# Altium PCB Recovery.PcbDoc (part 1 of 3)
Units mil, origin at the board's own origin, x right, y up, seen from the top; angles counter-clockwise.
Board outline 11025 x 3525 mil, 2 copper layers (Top Layer, Bottom Layer), stack 65.792 mil thick; 249 components, 149 nets, 729 pads, 156 vias.
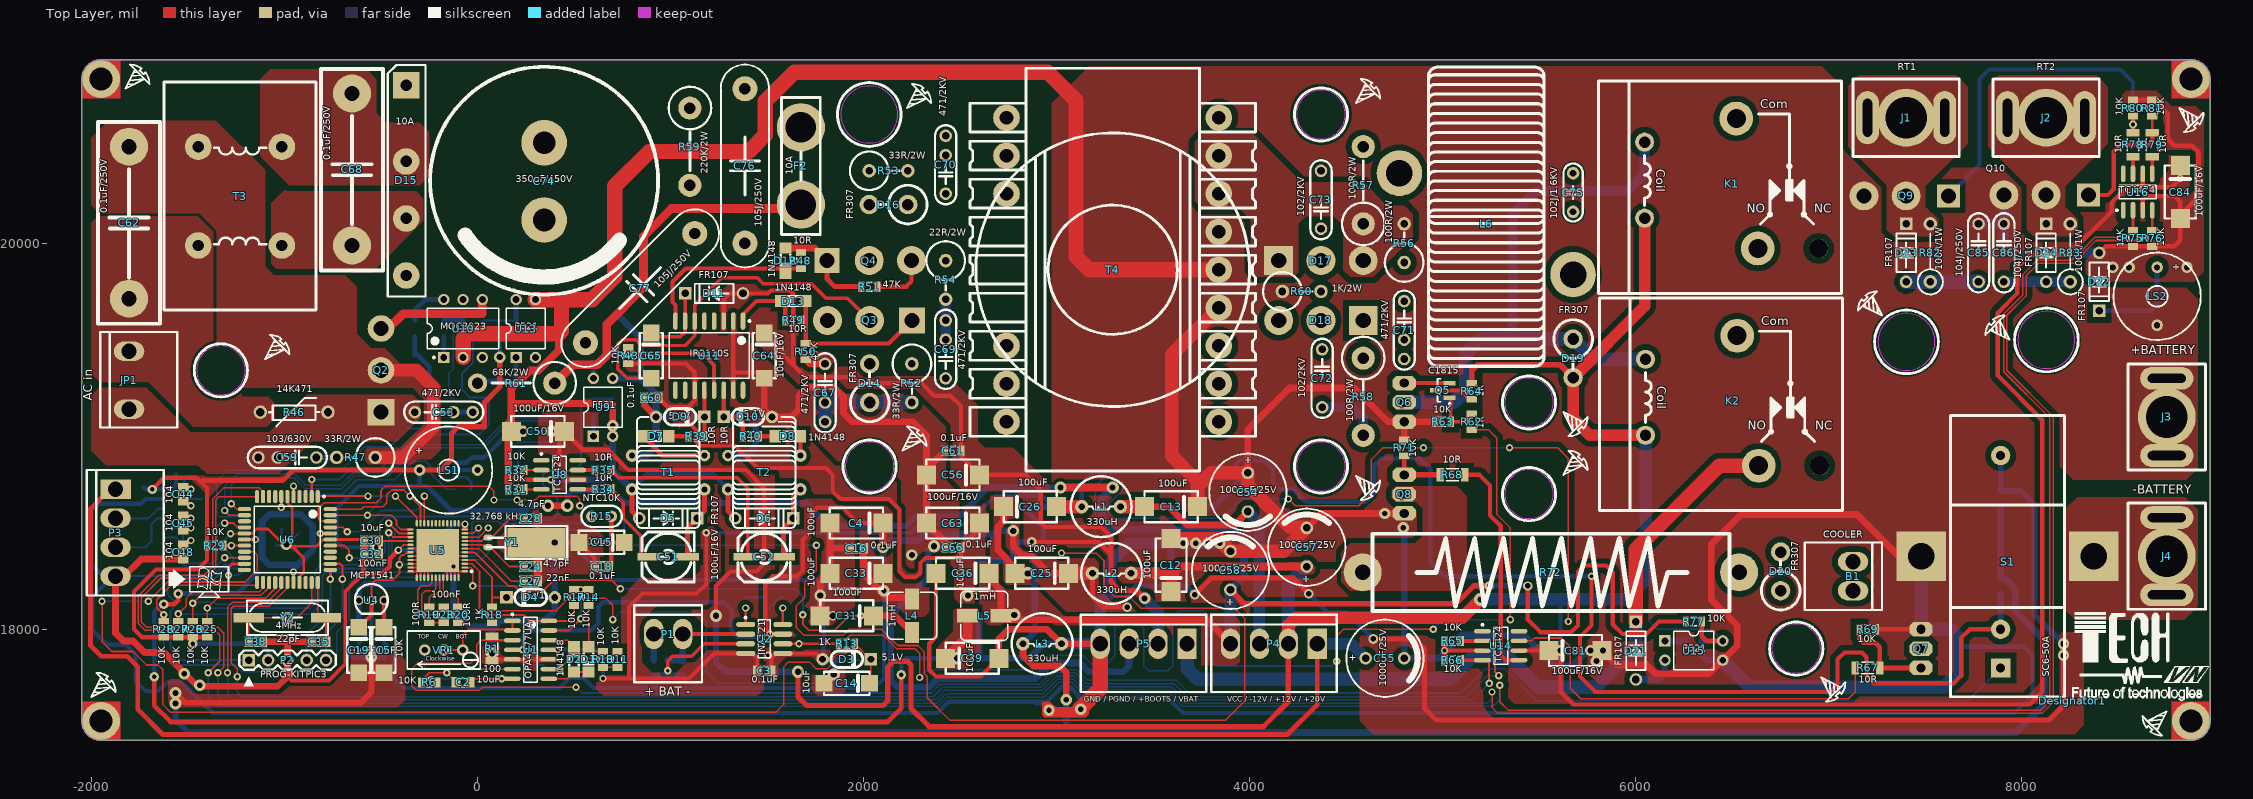
[diagram p0: Top Layer view]
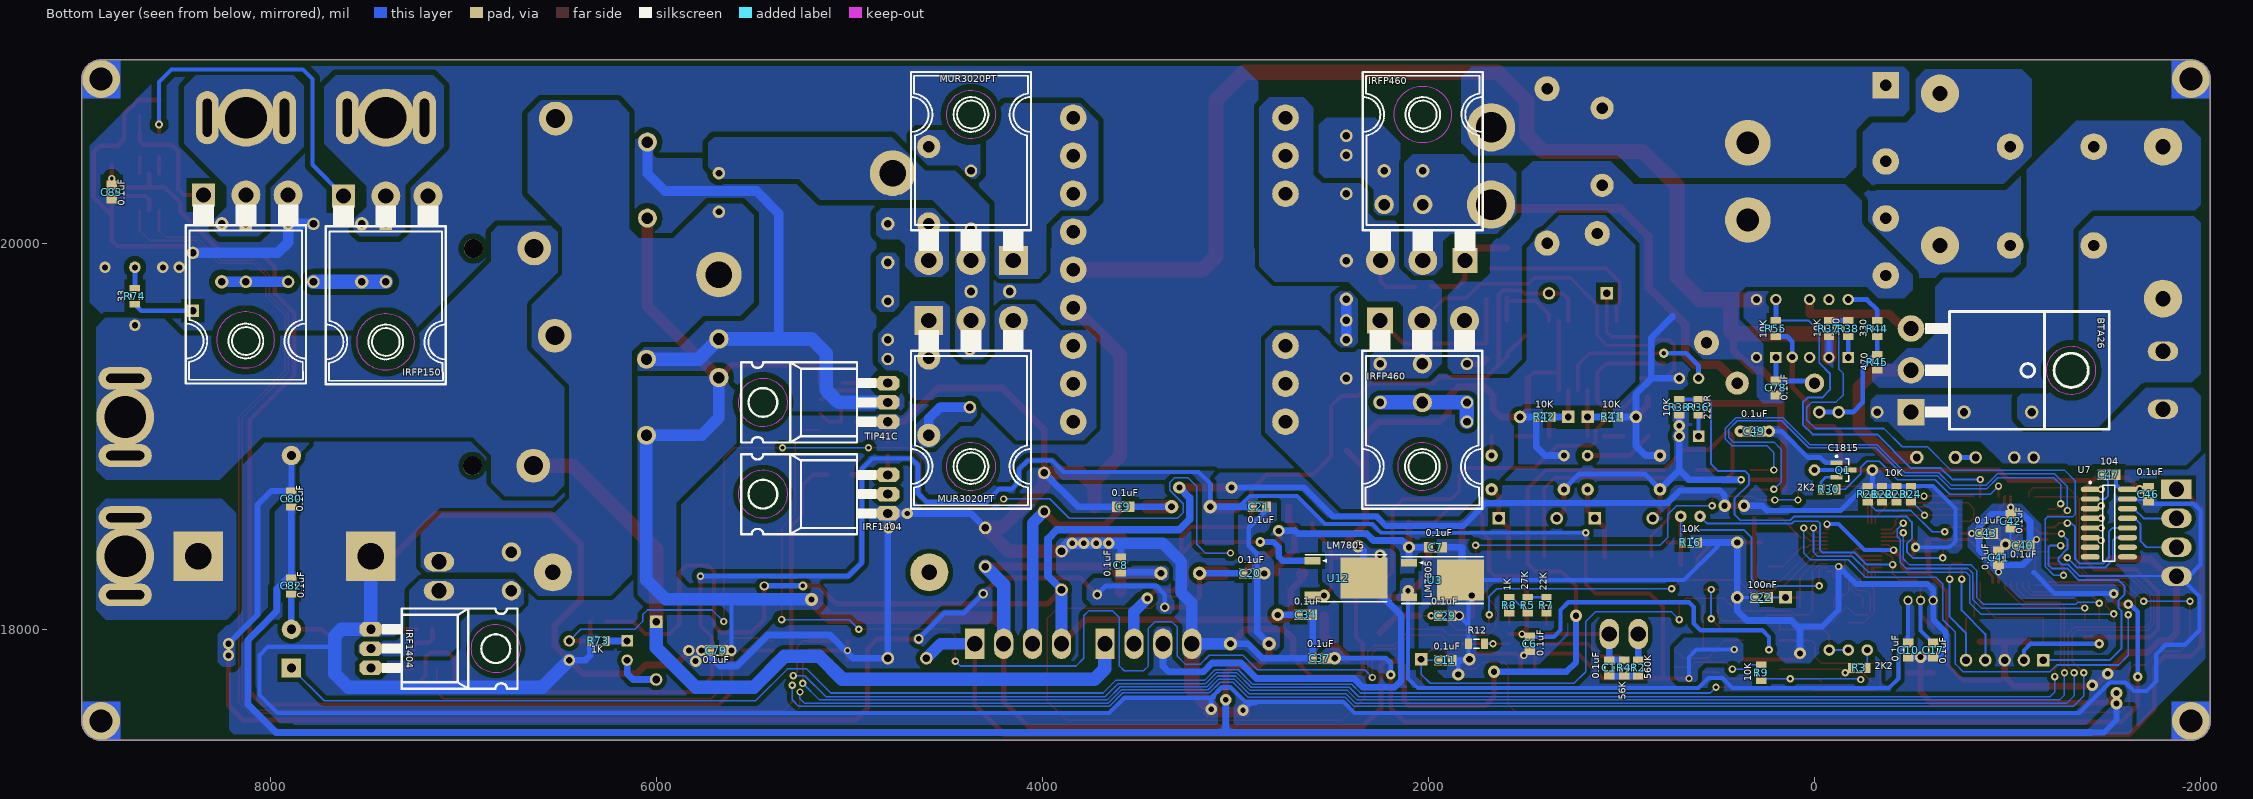
[diagram p1: Bottom Layer view, seen from below]

## Layer stack, top to bottom
Top Layer: signal copper 1.4
Dielectric: core 62.9921, FR-4, Dk 4.8
Bottom Layer: signal copper 1.4

## Board outline
-1950,17425 cw(c-1950,17525) -2050,17525 -2050,20850 cw(c-1950,20850) -1950,20950 8875,20950 cw(c8875,20850) 8975,20850 8975,17525 cw(c8875,17525) 8875,17425

## Design rules (kind name [scope] priority, off if disabled: settings)
Clearance [All] p1: gap=4
FabricationTestPointUsage TestPointUsage [All] p1: valid=0 allowmultiple=FALSE
FabricationTestpoint Testpoint [All] p1: side=3 testpointundercomponent=TRUE minsize=40 maxsize=100 preferedsize=60 minholesize=0 maxholesize=40 preferedholesize=32 testpointgrid=1 allowsidetop=TRUE allowsidebottom=TRUE usegrid=TRUE gridtolerance=0.01
HoleSize [All] p1: absolutevalues=TRUE maxlimit=99999 minlimit=1 maxpercent=80.000 minpercent=20.000
HoleToHoleClearance [All] p1: gap=0 allowstackedmicrovias=TRUE
MinimumSolderMaskSliver [All] p1: minsoldermaskwidth=0
PlaneConnect [All] p1: planeconnectstyle=Direct reliefexpansion=20 reliefentries=4 reliefconductorwidth=10 reliefairgap=10
PolygonConnect [All] p1: connectstyle=Direct reliefconductorwidth=10 reliefentries=4 polygonreliefangle="90 Angle"
RoutingVias [All] p1: holewidth=28 width=50 viastyle="Through Hole" minholewidth=28 minwidth=20 maxholewidth=200 maxwidth=500
SilkToSilkClearance [All] p1: silktosilkclearance=0
SilkscreenOverComponentPads [All] p1: minsilkscreentomaskgap=0
SolderMaskExpansion [All] p1: expansion=4
Width [All] p1: maxlimit=99999 minlimit=8 preferedwidth=99999
20 further rules are at their usual default settings.

## Classes and differential pairs
component class CPU: C1 C2 C3 C4 C5 C6 C7 C8 C9 C10 C11 C12 C13 C14 C15 C16 C17 C18 C19 C20 C21 C22 C23 C24 C25 C26 C27 C28 C29 C30 C31 C32 C33 C34 C35 C36 C37 C38 C39 C40 C41 C42 C43 C44 C45 C46 C47 C48 D1 D2 D3 D4 L1 L2 L3 L4 L5 LS1 P1 P2 P3 Q1 R1 R2 R3 R4 R5 R6 R7 R8 R9 R10 R11 R12 R13 R14 R15 R16 R17 R18 R19 R20 R21 R22 R23 R24 R25 R26 R27 R28 R29 R30 U1 U2 U3 U4 U5 U6 U7 VR1 Y1 Y2
component class Power: B1 BT1 C49 C50 C51 C52 C53 C54 C55 C56 C57 C58 C59 C60 C61 C62 C63 C64 C65 C66 C67 C68 C69 C70 C71 C72 C73 C74 C75 C76 C77 C78 C79 C80 C81 C82 C83 C84 C85 C86 D5 D6 D7 D8 D9 D10 D11 D12 D13 D14 D15 D16 D17 D18 D19 D20 D21 D22 D23 D24 F2 J1 J2 J3 J4 J5 JP1 K1 K2 L6 LS2 P4 P5 Q2 Q3 Q4 Q5 Q6 Q7 Q8 Q9 Q10 R31 R32 R33 R34 R35 R36 R37 R38 R39 R40 R41 R42 R43 R44 R45 R46 R47 R48 R49 R50 R51 R52 R53 R54 R55 R56 R57 R58 R59 R60 R61 R62 R63 R64 R65 R66 R67 R68 R69 R70 R71 R72 R73 R74 R75 R76 R77 R78 R79 R80 R81 R82 R83 RT1 RT2 S1 T1 T2 T3 T4 U8 U9 U10 U11 U12 U13 U14 U15 U16

## Components (designator, comment, footprint, x,y, rotation, side; value= is the part's Value field where it differs from the comment)
B1 "COOLER" H2-15A 7125,18350 r270 top
C1 "0.1uF" C0805 1062.5,17800 r270 bottom
C2 "10uF" C0805 -75,17725 r180 top
C3 "0.1uF" C0805 1485,17785 r0 top
C4 "100uF" C107-SMD 2100,18550 r0 top
C5 "10uF" C106-SMD -485,17775 r90 top
C6 "0.1uF" C0805 1475,17925 r270 bottom
C7 "0.1uF" C0805 1962.5,18425 r180 bottom
C8 "0.1uF" C0805 3592.5,18332.5 r90 bottom
C9 "0.1uF" C0805 3580,18635 r180 bottom
C10 "0.1uF" C0805 -485,17892.5 r270 bottom
C11 "0.1uF" C0805 1912.5,17840 r180 bottom
C12 "100uF" C107-SMD 3592.5,18195 r270 top
C13 "100uF" C107-SMD 3730,18635 r0 top
C14 "10uF" C106-SMD 1795,17720 r0 top
C15 "10uF" C106-SMD 525,18450 r0 top
C16 "0.1uF" C0805 1962.5,18420 r180 top
C17 "0.1uF" C0805 -615,17892.5 r270 bottom
C18 "0.1uF" C0805 642.5,18325 r180 top
C19 "10uF" C106-SMD -615,17775 r90 top
C20 "0.1uF" C0805 2922.5,18290 r180 bottom
C21 "0.1uF" C0805 2875,18635 r0 bottom
C22 "100nF" C0805 275,18165 r0 bottom
C23 "100nF" C0805 -175,18075 r90 top
C24 "4.7pF" C0805 275,18325 r0 top
C25 "100uF" C107-SMD 3060,18290 r0 top
C26 "100uF" C107-SMD 2725,18635 r180 top
C27 "22nF" C0805 275,18250 r180 top
C28 "4.7pF" C0805 275,18575 r0 top
C29 "0.1uF" C0805 1912.5,18070 r180 bottom
C30 "10uF" C0805 -550,18457.48 r0 top
C31 "100uF" C107-SMD 2050,18070 r0 top
C32 "100nF" C0805 -550,18390 r180 top
C33 "100uF" C107-SMD 2100,18290 r0 top
C34 "0.1uF" C0805 2635.33,18075 r180 bottom
C35 "22pF" C0805 -821.42,17935 r0 top
C36 "100uF" C107-SMD 2650,18290 r0 top
C37 "0.1uF" C0805 2562.5,17850 r0 bottom
C38 "22pF" C0805 -1148.58,17935 r180 top
C39 "100uF" C107-SMD 2425,17850 r180 top
C40 "0.1uF" C0805 -1079.49,18433.5 r0 bottom
C41 "0.1uF" C0805 -953.5,18370.51 r90 bottom
C42 "0.1uF" C0805 -1016.5,18559.49 r270 bottom
C43 "0.1uF" C0805 -890.51,18496.5 r180 bottom
C44 "104" C0805 -1525,18700 r270 top
C45 "104" C0805 -1525,18550 r270 top
C46 "0.1uF" C0805 -1730,18700 r270 bottom
C47 "104" C0805 -1525,18800 r0 bottom
C48 "104" C0805 -1525,18400 r90 top
C49 "0.1uF" C0805 312.5,19025 r180 bottom
C50 "100uF/16V" C107-SMD 450,19025 r0 top
C51 "100uF/16V" CAP-100UF/16V 887.5,18375 r0 top
C52 "100uF/16V" CAP-100UF/16V 1385,18375 r0 top
C53 "471/2KV" CAP2/3#1 -325,19125 r0 top
C54 "1000uF/25V" C-400 3990,18710 r90 top
C55 "1000uF/25V" C-400 4700,17850 r180 top
C56 "100uF/16V" C107-SMD 2600,18800 r0 top
C57 "1000uF/25V" C-400 4295,18425 r270 top
C58 "1000uF/25V" C-400 3900,18305 r270 top
C59 "103/630V" CAP2/3#1 -835,18890 r180 top
C60 "0.1uF" C0805 900,19200 r180 top
C61 "0.1uF" R0805 2462.5,18925 r180 top
C62 "0.1uF/250V" CAP-105J/250V -1805,20500 r270 top
C63 "100uF/16V" C107-SMD 2600,18550 r0 top
C64 "10uF/16V" C106-SMD 1485,19300 r90 top
C65 "1uF" C106-SMD 900,19300 r90 top
C66 "0.1uF" R0805 2462.5,18425 r180 top
C67 "471/2KV" CAP2/3#1 1800,19375 r270 top
C68 "0.1uF/250V" CAP-105J/250V -650,20775.59 r270 top
C69 "471/2KV" CAP2/3#1 2425,19300 r90 top
C70 "471/2KV" CAP2/3#1 2425,20256.3 r90 top
C71 "471/2KV" CAP2/3#1 4800,19700 r270 top
C72 "102/2KV" CAP2/3#2 4375,19450 r270 top
C73 "102/2KV" CAP2/3#2 4368.9,20075 r90 top
C74 "350uF/450V" CAP-330uH-450V 345,20320.28 r270 top
C75 "102J/1.6KV" CAP200 5675,20162.5 r180 top
C76 "105J/250V" CAP800 1385,20800 r270 top
C77 "105J/250V" CAP800 1125,20050 r225 top
C78 "0.1uF" C0805 200,19250 r270 bottom
C79 "0.1uF" C0805 5687.5,17890 r0 bottom
C80 "0.1uF" R0805 7889.57,18675 r90 bottom
C81 "100uF/16V" C107-SMD 5550,17890 r180 top
C82 "0.1uF" R0805 7889.57,18225 r90 bottom
C83 "0.1uF" C0805 8820,20265 r270 bottom
C84 "100uF/16V" C107-SMD 8820,20402.5 r90 top
C85 "104J/250V" CAP2/3#2 7775,20100 r270 top
C86 "104J/250V" CAP2/3#2 7906.1,20100 r270 top
D1 "1N4148" 1N4148-SMD 575,17908.9 r270 top
D2 "1N4148" 1N4148-SMD 500,17778.9 r90 top
D3 "5.1V" 1N4148 1787.5,17845 r0 top
D4 "5V1" 1N4148 400,18165 r180 top
D5 "FR107" DIODE-1A/300 837.5,18575 r0 top
D6 "FR107" DIODE-1A/300 1335,18575 r0 top
D7 "1N4148" 1N4148-SMD 860,19000 r0 top
D8 "1N4148" 1N4148-SMD 1672.5,19000 r180 top
D9 "5.1V" 1N4148 925,19100 r0 top
D10 "5.1V" 1N4148 1525,19100 r180 top
D11 "FR107" DIODE-1A/300 1375,19740 r180 top
D12 "1N4148" 1N4148-SMD 1595,19975 r270 top
D13 "1N4148" 1N4148-SMD 1700,19700 r180 top
D14 "FR307" FR307 2031.1,19175 r90 top
D15 "10A" DB-10A -370,20325 r270 top
D16 "FR307" FR307 2228.9,20200 r180 top
D17 "MUR3020PT" TO-247-OUTLINE#1 4150,19910 r0 top
D18 "MUR3020PT" TO-247-OUTLINE#1 4587.8,19600 r180 top
D19 "FR307" FR307 5675,19503.7 r270 top
D20 "FR307" FR307 6750,18200 r90 top
D21 "FR107" DIODE-1A/300 6000,17740 r90 top
D22 "FR107" DIODE-1A/300 8400,19950 r270 top
D23 "FR107" DIODE-1A/300 7400,19800 r90 top
D24 "FR107" DIODE-1A/300 8125,19800 r90 top
Designator1 "Comment" ? 8260,17630 r0 top
F2 "10A" FUSE-DC 1675,20200 r90 top
J1 "RT1" M4-ON 7400,20650 r180 top
J2 "RT2" M4-ON 8125,20650 r180 top
J3 "+BATTERY" M4-ON 8750,19100 r270 top
J4 "-BATTERY" M4-ON 8750,18378.74 r270 top
JP1 "AC in" H3-15A -1805,19440 r180 top
K1 "RELAY30A" RELAY30A 6045,20130 r0 top
K2 "RELAY30A" RELAY30A 6050,19005 r0 top
L1 "330uH" L-330uH 3330,18635 r180 top
L2 "330uH" L-330uH 3385,18290 r180 top
L3 "330uH" L-330uH 3025,17925 r180 top
L4 "1mH" IND-7447785002 2250,18070 r270 top
L5 "1mH" IND-7447785002 2625,18070 r180 top
L6 "Inductor Iron" IND-10A 5225,20100 r270 top
LS1 "Speaker" BEEPER 0,18825 r180 top
LS2 "Speaker" BEEPER 8700,19575 r90 top
P1 "Header 2" H2-15A 912.5,17975 r0 top
P2 "PROG-KITPIC3" CON-5B -1185,17840 r90 top
P3 "Header 4" H4-15A -1875,18725 r180 top
P4 "Header 4" H4-15A 4350,17925 r90 top
P5 "Header 4" H4-15A 3675,17925 r90 top
Q1 "C1815" SOT-23 -150,18825 r180 bottom
Q2 "BTA26" TOP3 -500,19125 r90 top
Q3 "IRFP460" TO-247-OUTLINE#2 2250,19600 r180 top
Q4 "IRFP460" TO-247-OUTLINE#3 1810,19910 r0 top
Q5 "C1815" SOT-23 5000,19237.6 r180 top
Q6 "TIP41C" "TO-220-FULL OUTLINE" 4800,19275 r270 top
Q7 "IRF1404" "TO-220-FULL OUTLINE" 7477.56,17800 r90 top
Q8 "IRF1404" "TO-220-FULL OUTLINE" 4800,18800 r270 top
Q9 "IRFP150" TO-247-OUTLINE#4 7618.9,20245 r180 top locked
Q10 "IRFP150" TO-247-OUTLINE#4 8343.9,20250 r180 top
R1 "100" R1206 75,17900 r90 top
R2 "560K" R0805 912.5,17800 r270 bottom
R3 "2K2" R0805 -232.09,17800 r180 bottom
R4 "56K" R0805 985,17800 r270 bottom
R5 "27K" R0805 1485,18125 r270 bottom
R6 "10K" R0805 -250,17725 r180 top
R7 "22K" R0805 1388.54,18125 r90 bottom
R8 "1K" R0805 1581.46,18125 r270 bottom
R9 "10K" R0805 275,17775 r270 bottom
R10 "10K" R0805 650,17843.9 r270 top
R11 "10K" R0805 725,17843.9 r270 top
R12 "10K" R0805 1750,17925 r0 bottom
R13 "1K" R0805 1912.5,17925 r0 top
R14 "10K" R0805 575,18165 r270 top
R15 "NTC10K" CAP100 592.5,18585 r0 top
R16 "10K" R0805 642.5,18450 r180 bottom
R17 "10K" R0805 500,18165 r90 top
R18 "1K" R0805 75,18075 r270 top
R19 "100R" R0805 -250,18075 r90 top
R20 "100R" R0805 -100,18075 r90 top
R21 "10K" R0805 -275.47,18700 r90 bottom
R22 "10K" R0805 -350,18700 r90 bottom
R23 "10K" R0805 -425,18700 r90 bottom
R24 "10K" R0805 -500,18700 r90 bottom
R25 "10K" R0805 -1400,18000 r270 top
R26 "10K" R0805 -1475,18000 r270 top
R27 "10K" R0805 -1550,18000 r270 top
R28 "10K" R0805 -1625,18000 r270 top
R29 "10K" R0805 -1360,18433.5 r0 top
R30 "2K2" R0805 -75,18725 r180 bottom
R31 "10K" R0805 200,18725 r180 top
R32 "10K" R0805 200,18825 r180 top
R33 "10K" R0805 700,19150 r270 bottom
R34 "10R" R0805 650,18725 r180 top
R35 "10R" R0805 650,18825 r180 top
R36 "220R" R0805 600,19150 r90 bottom
R37 "10K" R0805 -75,19558.07 r270 bottom
R38 "330" R0805 -175,19558.07 r90 bottom
R39 "10R" R0805 1133.66,19000 r180 top
R40 "10R" R0805 1415,19000 r0 top
R41 "10K" R0805 1050,19100 r180 bottom
R42 "10K" R0805 1400,19100 r0 bottom
R43 "10K" R0805 780,19417.5 r90 top
R44 "330" R0805 -325,19558.07 r90 bottom
R45 "470" R0805 -325,19382.87 r90 bottom
R46 "14K471" MOV471 -1125,19125 r0 top
R47 "33R/2W" RES-2W/200 -530,18890 r180 top
R48 "10R" R0805 1675,19910 r270 top
R49 "10R" R0805 1635,19600 r180 top
R50 "47K" R0805 1700,19438.66 r270 top
R51 "47K" R0805 2028.9,19775 r0 top
R52 "33R/2W" RES-2W/200 2250,19375 r270 top
R53 "33R/2W" RES-2W/200 2028.9,20375 r0 top
R54 "22R/2W" RES-2W/200 2425,19910 r270 top
R55 "10K" R0805 200,19558.07 r90 bottom
R56 "100R/2W" RES-2W/200 4800,19900 r90 top
R57 "100R/2W" RES-2W/400#1 4587.8,20300 r90 top
R58 "100R/2W" RES-2W/400#1 4587.8,19205 r270 top
R59 "220K/2W" RES-2W/400#1 1100,20500 r270 top
R60 "1K/2W" RES-2W/200 4168.9,19750 r0 top
R61 "68K/2W" RES-2W/400#2 200,19275 r180 top
R62 "1K" R0805 5150,19075 r90 top
R63 "10K" R0805 5000,19075 r180 top
R64 "1K" R0805 5150,19233.07 r270 top
R65 "10K" R0805 5050,17940 r0 top
R66 "10K" R0805 5050,17840 r0 top
R67 "10R" R1206 7200,17800 r0 top
R68 "10R" R1206 5050,18800 r180 top
R69 "10K" R0805 7200,18000 r180 top
R71 "10K" R0805 4800,18940 r270 top
R72 "47R/10W" RES-10W 4585,18295 r90 top
R73 "1K" R0805 6300,17940 r180 bottom
R74 "33" R0805 8700,19725 r270 bottom
R75 "10K" R0805 8575,20025 r270 top
R76 "10K" R0805 8675,20025 r270 top
R77 "10K" R0805 6300,18040 r180 top
R78 "10R" R1206 8575,20510 r90 top
R79 "10R" R1206 8675,20510 r90 top
R80 "10K" R0805 8575,20700 r90 top
R81 "10K" R0805 8675,20700 r90 top
R82 "100R/1W" RES-1W/110 7525,19800 r90 top
R83 "100R/1W" RES-1W/110 8250,19800 r90 top
S1 "SC6-50A" SC6-50A 7925,18350 r0 top
T1 "Trans Cupl" TRANS-Driver#1 1175,18725 r90 top
T2 "Trans Cupl" TRANS-Driver#2 1672.5,18725 r90 top
T3 "Filter AC" IND-10A-4PIN -1230,20244.09 r0 top
T4 "Trans CT Ideal" TRANS-F 2740,20650 r0 top
U1 "OPA4277UA" SOIC-14 275,17893.9 r0 top
U2 "INA121" 182H_M 1485,17950 r0 top
U3 "LM7805" 78M05-SMD 2100,18345 r270 bottom
U4 "MCP1541" MCP1541 -550,18150 r0 top
U5 "ADS1158" ADS1158 -65.82,18300 r180 top
U6 "DSPIC30F2023T-30I/PT" TQFP-PT44_N -985,18465 r270 top
U7 "MAX232" NSO16_M -1525,18550 r180 bottom
U8 "TC4424" 8-SOIC_751 425,18800 r0 top
U9 "P521" DIP-4 650,19150 r0 top
U10 "MOC3023" DIP-6/300 -75,19558.07 r90 top
U11 "IR2110S" SOIC16_N 1200,19417.5 r270 top
U12 "LM7805" 78M05-SMD 2600,18355 r270 bottom
U13 "P521" DIP-4 250,19558.07 r0 top
U14 "TC4424" 8-SOIC_751 5300,17915 r0 top
U15 "P521" DIP-4 6300,17890 r270 top
U16 "TC4424" 8-SOIC_751 8600,20265 r90 top
VR1 "10K" RPOT-PV36W -175,17892.5 r0 top
Y1 "32.768 kHz" XTA-32.768K 55,18425 r0 top
Y2 "4MHz" XTA_SMD -785,18060 r180 top

## Footprints (in the part's own frame and the unit in brackets; to place one, negate y for a bottom-side part, rotate by r counter-clockwise, add the part's x,y. Pads: shape width x height; smd on the part's side, far side on the other; paste and mask are expansions set on the pad)
1N4148 [mil]
  round 65 hole 35.43: 1(0,0)
  rect 65x65 hole 35.43: 2(250,0)
  silkscreen extent 42,-43 208,43
1N4148-SMD [mm]
  rect 1.5x1.6 smd: 1(0,0) 2(3.302,0)
  silkscreen extent 0.89,-0.63 2.29,0.64, body extent 0.65,-0.63 2.65,0.62, height 0.78
8-SOIC_751 [mm] "SOIC, 8-Leads, Body 4.9x3.9mm (max), Pitch 1.27mm, IPC Medium Density"
  oval 2.2x0.6 smd: 1(-2.4,1.905) 2(-2.4,0.635) 3(-2.4,-0.635) 4(-2.4,-1.905) 5(2.4,-1.905) 6(2.4,-0.635) 7(2.4,0.635) 8(2.4,1.905)
  silkscreen extent -2.52,-2.45 0.9,2.88, body extent -1.95,-2.45 1.95,2.45, height 1.55
78M05-SMD [mm]
  rect 1x2.1 smd: 1(0,0) 3(4.57,0)
  rect 5.4x6.2 smd: 2(2.285,6.75)
  silkscreen extent -0.8,-0.95 5.37,9.75
182H_M [mm] "SOIC, 8-Leads, Body 4.9x3.9mm, Pitch 1.27mm, IPC Low Density"
  oval 2.5x0.7 smd: 1(-2.45,1.905) 2(-2.45,0.635) 3(-2.45,-0.635) 4(-2.45,-1.905) 5(2.45,-1.905) 6(2.45,-0.635) 7(2.45,0.635) 8(2.45,1.905)
  silkscreen extent -2.57,-2.5 0.8,2.93, body extent -2,-2.5 2,2.5, height 1.75
ADS1158 [mm] "QFN, 48-Leads, Body 7.1x7.1mm (max), Pitch 0.50mm, IPC Medium Density"
  oval 0.85x0.3 smd: 1(0,0) 2(0,-0.5) 3(0,-1) 4(0,-1.5) 5(0,-2) 6(0,-2.5) 7(0,-3) 8(0,-3.5) 9(0,-4) 10(0,-4.5) 11(0,-5) 12(0,-5.5) 25(7.15,-5.5) 26(7.15,-5) 27(7.15,-4.5) 28(7.15,-4) 29(7.15,-3.5) 30(7.15,-3) 31(7.15,-2.5) 32(7.15,-2) 33(7.15,-1.5) 34(7.15,-1) 35(7.15,-0.5) 36(7.15,0)
  oval 0.3x0.85 smd: 13(0.825,-6.325) 14(1.325,-6.325) 15(1.825,-6.325) 16(2.325,-6.325) 17(2.825,-6.325) 18(3.325,-6.325) 19(3.825,-6.325) 20(4.325,-6.325) 21(4.825,-6.325) 22(5.325,-6.325) 23(5.825,-6.325) 24(6.325,-6.325) 37(6.325,0.825) 38(5.825,0.825) 39(5.325,0.825) 40(4.825,0.825) 41(4.325,0.825) 42(3.825,0.825) 43(3.325,0.825) 44(2.825,0.825) 45(2.325,0.825) 46(1.825,0.825) 47(1.325,0.825) 48(0.825,0.825)
  rect 5.6x5.6 smd: 49(3.575,-2.75)
  silkscreen extent -1,-0.12 -0.75,0.12, body extent 0.03,-6.3 7.12,0.8, height 0.9
BEEPER [mil]
  round 60 hole 31.5: 1(0,0) 2(300,0)
  silkscreen extent -76,-226 376,226, body extent -80,-235 385,230, height 374
C106-SMD [mm]
  rect 2.2x2.2 smd: 1(5.969,0) 2(0,0)
  silkscreen extent 0,-1.52 5.97,1.52
C107-SMD [mm]
  rect 2.5x2.5 smd: 1(0,0) 2(-6.985,0)
  silkscreen extent -6.98,-2.03 0,2.03
C0805 [mm] "Chip Capacitor, 2-Leads, Body 2.0x1.3mm, IPC Medium Density"
  rect 1.15x1.4 smd: 1(-0.925,0) 2(0.925,0)
  silkscreen extent -0.22,-0.6 0.23,0.6, body extent -1,-0.63 1,0.63, height 0.85
C-400 [mil]
  round 65 hole 39.37: 1(100,0) 2(-100,0)
  silkscreen extent -200,-200 200,200
CAP2/3#1 [mil]
  round 65 hole 39.37: 1(0,0) 2(200,0) 2(300,0)
  silkscreen extent -55,-55 355,55
CAP2/3#2 [mil]
  round 65 hole 39.37: 1(0,0) 2(300,0)
  silkscreen extent -55,-55 355,55
CAP100 [mil]
  round 60 hole 27.56: 1(0,0) 2(100,0)
  silkscreen extent -55,-55 155,55
CAP200 [mil]
  round 65 hole 35.43: 1(0,0) 2(0,-200)
  silkscreen extent -50,-250 50,50
CAP800 [mil]
  round 130 hole 59.06: 1(0,0) 2(800,0)
  silkscreen extent -125,-125 925,125
CAP-100UF/16V [mm] "Capacitor 100uF 16V SMD"
  rect 3x1 smd: 1(0,0) 2(5.08,0)
  silkscreen extent -0.89,-3.3 5.97,3.3
CAP-105J/250V [mm]
  round 5 hole 2: 1(0,0) 2(20,0)
  silkscreen extent -3.23,-4.09 23.29,4.06
CAP-330uH-450V [mm]
  round 6 hole 3: 1(-5.08,0) 2(5.08,0)
  silkscreen extent -15.08,-15 14.92,15
CON-5B [mil]
  rect 65x65 hole 39.37: 1(0,0)
  round 65 hole 39.37: 2(0,-100) 3(0,-200) 4(0,-300) 5(0,-400)
  silkscreen extent -50,-450 50,50
DB-10A [mm]
  round 3.5 hole 1.5: 1(12.5,0) 2(-2.5,0) 4(5,0)
  rect 3.5x3.5 hole 1.5: 3(-12.5,0)
  silkscreen extent -15.2,-2.41 15.28,2.54
DIODE-1A/300 [mil]
  round 65 hole 39.37: 1(0,0)
  rect 65x65 hole 39.37: 2(300,0)
  silkscreen extent 50,-50 250,50
DIP-4 [mm] "DIP; 4 Leads; Row Spacing 7.62 mm; Pitch 2.54 mm"
  rect 1.5x1.5 hole 0.9: 1(-1.27,-3.81)
  round 1.5 hole 0.9: 2(1.27,-3.81) 3(1.27,3.81) 4(-1.27,3.81)
  silkscreen extent -2.55,-2.65 2.55,2.65
DIP-6/300 [mm] "DIP, 6-Pin, Row Spacing 7.62 mm, Pitch 2.54 mm"
  rect 1.5x1.5 hole 0.9: 1(-3.81,2.54)
  round 1.5 hole 0.9: 2(-3.81,0) 3(-3.81,-2.54) 4(3.81,-2.54) 5(3.81,0) 6(3.81,2.54)
  silkscreen extent -3.93,-4.7 2.65,4.7, body extent -3.55,-4.7 3.55,4.7, height 5.46
FR307 [mil]
  round 100 hole 60: 1(0,0) 2(200,0)
  silkscreen extent -100,-100 155,100
FUSE-DC [mm]
  round 6.35 hole 4: 1(0,0) 2(10.16,0)
  silkscreen extent -3.94,-2.54 14.1,2.54
H2-15A [mm]
  oval 2.54x4 hole 2: 1(0,0) 2(3.81,0)
  silkscreen extent -2.54,-6.35 6.35,3.81
H3-15A [mm]
  oval 4x2.54 hole 2: 1(0,0) 3(0,7.62)
  silkscreen extent -6.35,-2.54 3.81,10.03
H4-15A [mm]
  rect 4x2.54 hole 2: 1(0,0)
  oval 4x2.54 hole 2: 2(0,3.81) 3(0,7.62) 4(0,11.43)
  silkscreen extent -6.35,-2.54 3.81,13.97
IND-10A [mm]
  round 6 hole 3.5: 1(-6.667,-11.43) 2(6.667,11.43)
  silkscreen extent -20.64,-7.62 18.73,7.62
IND-10A-4PIN [mm]
  round 3.5 hole 1.5: 1(-5.5,-6.5) 2(5.5,-6.5) 3(-5.5,6.5) 4(5.5,6.5)
  silkscreen extent -10,-15 10,15
IND-7447785002 [mm] "Precision Wire Wound Inductor, 2-Leads, Body 5.9x6.2mm, IPC Medium Density"
  rect 2.8x1.8 smd: 1(-2.2,0) 2(2.2,0)
  silkscreen extent -3.1,-3.25 3.1,3.25, body extent -3.1,-3.25 3.1,3.25, height 3.3
L-330uH [mil]
  round 70 hole 35.43: 1(0,0) 2(200,0)
  silkscreen extent -57,-157 257,157
M4-ON [mm]
  oval 3x7 hole 1.2 slot 5 at 90 deg: 1(-5.08,0) 1(5.08,0)
  round 7.62 hole 5.5: 1(0,0)
  silkscreen extent -6.98,-5.08 6.98,5.08
MCP1541 [mil]
  round 48 hole 31.5: 1(-65,0) 2(0,0) 3(65,0)
  silkscreen extent -85,-70 85,85
MOV471 [mil] "Metal oxide varistor 470V"
  round 70 hole 43.31: 1(0,0) 2(350,0)
  silkscreen extent 44,-73 305,74
NSO16_M [mm] "SOIC, 16-Leads, Body 9.9x3.9mm, Pitch 1.27mm, IPC Low Density"
  oval 2.5x0.7 smd: 1(-2.45,4.445) 2(-2.45,3.175) 3(-2.45,1.905) 4(-2.45,0.635) 5(-2.45,-0.635) 6(-2.45,-1.905) 7(-2.45,-3.175) 8(-2.45,-4.445) 9(2.45,-4.445) 10(2.45,-3.175) 11(2.45,-1.905) 12(2.45,-0.635) 13(2.45,0.635) 14(2.45,1.905) 15(2.45,3.175) 16(2.45,4.445)
  silkscreen extent -2.58,-5 0.8,5.47, body extent -2,-5 2,5, height 1.75
R0805 [mm] "Chip Resistor, 2-Leads, Body 2.0x1.3mm, IPC Medium Density"
  rect 0.9x1.35 smd: 1(-1.05,0) 2(1.05,0)
  silkscreen extent -0.38,-0.58 0.38,0.58, body extent -1,-0.63 1,0.63, height 0.6
R1206 [mm] "Chip Resistor, 2-Leads, Body 3.2x1.6mm, IPC Medium Density"
  rect 1x1.75 smd: 1(-1.6,0) 2(1.6,0)
  silkscreen extent -0.8,-0.77 0.8,0.77, body extent -1.6,-0.8 1.6,0.8, height 0.6
RELAY30A [mm]
  round 2.5 hole 1.5: 1(0,0) 2(0,10)
  round 4.445 hole 2.5: 3(12.065,13.1) 4(14.896,-4)
  round 2.5 hole 2.5: 5(22.897,-4)
  silkscreen extent -6.07,-9.9 25.91,18.05, body extent -5.72,-9.4 25.28,17.1, height 28
RES-1W/110 [mil]
  round 70 hole 39.37: 1(0,0) 2(300,0)
  silkscreen extent -65,-65 250,65
RES-2W/200 [mil]
  round 70 hole 39.37: 1(0,0) 2(200,0)
  silkscreen extent -100,-100 155,100
RES-2W/400#1 [mil]
  round 120 hole 59.06: 1(-200,0) 2(200,0)
  silkscreen extent -310,-110 125,110
RES-2W/400#2 [mil]
  round 120 hole 59.06: 1(-200,0)
  round 100 hole 59.06: 2(200,0)
  silkscreen extent -310,-110 125,110
RES-10W [mm]
  round 5 hole 2: 1(0,0) 2(0,-49.53)
  silkscreen extent -5.08,-48.26 5.08,-1.27
RPOT-PV36W [mil]
  round 60 hole 31.5: 1(98.43,0) 2(0,0) 3(-98.43,0)
  silkscreen extent -189,-98 189,98
SC6-50A [mm]
  rect 6.5x6.5 hole 3.5: 1(11.365,0.73) 2(-11.365,0.73)
  round 2.54 hole 1.2: 3(-0.9,13.97) 4(-0.9,-8.89)
  rect 2.54x2.54 hole 1.2: 5(-0.9,-13.97)
  silkscreen extent -7.5,-17.77 7.5,19.23
SOIC16_N [mm] "SOIC, 16-Leads, Body 10.3x7.5mm, Pitch 1.27mm, IPC Medium Density"
  oval 2.3x0.6 smd: 1(-4.55,4.445) 2(-4.55,3.175) 3(-4.55,1.905) 4(-4.55,0.635) 5(-4.55,-0.635) 6(-4.55,-1.905) 7(-4.55,-3.175) 8(-4.55,-4.445) 9(4.55,-4.445) 10(4.55,-3.175) 11(4.55,-1.905) 12(4.55,-0.635) 13(4.55,0.635) 14(4.55,1.905) 15(4.55,3.175) 16(4.55,4.445)
  silkscreen extent -4.67,-5.25 3,5.42, body extent -3.75,-5.15 3.75,5.15, height 2.65
SOIC-14 [mm] "SOIC, 14-Leads, Body 8.6x3.9mm (max), Pitch 1.27mm, IPC Medium Density"
  oval 2.2x0.6 smd: 1(-2.4,3.81) 2(-2.4,2.54) 3(-2.4,1.27) 4(-2.4,0) 5(-2.4,-1.27) 6(-2.4,-2.54) 7(-2.4,-3.81) 8(2.4,-3.81) 9(2.4,-2.54) 10(2.4,-1.27) 11(2.4,0) 12(2.4,1.27) 13(2.4,2.54) 14(2.4,3.81)
  silkscreen extent -2.52,-4.3 0.9,4.78, body extent -1.95,-4.33 1.95,4.33, height 1.75
SOT-23 [mm]
  rect 1.6x0.6 smd: 1(-0.9,0.95) 2(-0.9,-0.95) 3(0.9,0)
  silkscreen extent -1.02,-1.5 0.7,1.92, body extent -0.7,-1.52 0.7,1.52, height 1.1
"TO-220-FULL OUTLINE" [mil]
  oct 75x120 hole 47.24: 1(0,0) 2(100,0) 3(200,0)
TO-247-OUTLINE#1 [mm]
  rect 3.81x3.81 hole 2: 1(0,0)
  round 3.81 hole 2: 2(5.56,0) 3(11.12,0)
TO-247-OUTLINE#2 [mm]
  rect 3.429x3.429 hole 2: 1(0,0)
  round 3.81 hole 2: 2(5.56,0) 3(11.12,0)
TO-247-OUTLINE#3 [mm]
  rect 3.302x3.302 hole 2: 1(0,0)
  round 3.81 hole 2: 2(5.56,0) 3(11.12,0)
TO-247-OUTLINE#4 [mm]
  rect 3.048x3.048 hole 2: 1(0,0)
  round 3.81 hole 2: 2(5.56,0) 3(11.12,0)
TOP3 [mm]
  rect 3.5x3.5 hole 2: 1(0,0)
  round 3.5 hole 2: 2(5.5,0) 3(11,0)
TQFP-PT44_N [mm] "Thin QFP, 44-Leads, Body 10x10mm, Pitch 0.8mm, IPC Medium Density"
  oval 1.75x0.55 smd: 1(-5.65,4) 2(-5.65,3.2) 3(-5.65,2.4) 4(-5.65,1.6) 5(-5.65,0.8) 6(-5.65,0) 7(-5.65,-0.8) 8(-5.65,-1.6) 9(-5.65,-2.4) 10(-5.65,-3.2) 11(-5.65,-4) 23(5.65,-4) 24(5.65,-3.2) 25(5.65,-2.4) 26(5.65,-1.6) 27(5.65,-0.8) 28(5.65,0) 29(5.65,0.8) 30(5.65,1.6) 31(5.65,2.4) 32(5.65,3.2) 33(5.65,4)
  oval 0.55x1.75 smd: 12(-4,-5.65) 13(-3.2,-5.65) 14(-2.4,-5.65) 15(-1.6,-5.65) 16(-0.8,-5.65) 17(0,-5.65) 18(0.8,-5.65) 19(1.6,-5.65) 20(2.4,-5.65) 21(3.2,-5.65) 22(4,-5.65) 34(4,5.65) 35(3.2,5.65) 36(2.4,5.65) 37(1.6,5.65) 38(0.8,5.65) 39(0,5.65) 40(-0.8,5.65) 41(-1.6,5.65) 42(-2.4,5.65) 43(-3.2,5.65) 44(-4,5.65)
  silkscreen extent -5.77,-4.35 4.35,4.95, body extent -5,-5 5,5, height 1.2
TRANS-Driver#1 [mil]
  round 65 hole 31.5: 1(0,0) 2(0,375) 4(175,375)
  round 60 hole 31.5: 3(175,0)
  silkscreen extent -200,25 375,350
TRANS-Driver#2 [mil]
  round 65 hole 31.5: 1(0,0) 2(0,375) 3(175,0)
  round 60 hole 31.5: 4(175,375)
  silkscreen extent -200,25 375,350
TRANS-F [mm]
  round 3.5 hole 1.8: 1(0,-10) 1(0,-5) 1(0,0) 4(0,-40) 4(0,-35) 4(0,-30) 5(27.94,-40) 5(27.94,-35) 5(27.94,-30) 6(27.94,-25) 6(27.94,-20) 6(27.94,-15) 8(27.94,-10) 8(27.94,-5) 8(27.94,0)
  silkscreen extent -4.83,-46.5 32.77,6.5
XTA-32.768K [mil]
  oval 50x32 smd: 1(0,0) 2(0,50)
  rect 300x150 smd: 3(250,25)
  silkscreen extent -5,-60 410,110
XTA_SMD [mm]
  rect 4x1.2 smd: 1(0,0) 2(10.16,0)
  silkscreen extent -0.25,-2.29 10.41,2.29
? [mil]
  silkscreen extent 0,0 708,458

## Part data
B1: library part "Motor Servo", "Servo Motor"
C1 C3 C6 C7 C8 C9 C10 C11 C16 C17 C18 C20 C21 C29 C34 C35 C37 C38 C40 C41 C42 C43 C44 C45 C46 C47 C48 C49 C53 C59 C60 C61 C62 C66 C67 C68 C69 C70 C71 C72 C73 C75 C76 C77 C78 C79 C80 C82 C83 C85 C86: library part Cap, "Capacitor"
C2 C30: library part Cap, "CAP CER 10UF 25V X5R 1206"
C4 C5 C12 C13 C14 C15 C19 C25 C26 C31 C33 C36 C39 C50 C51 C52 C54 C55 C56 C57 C58 C63 C64 C65 C74 C81 C84: library part "Cap Pol1", "Polarized Capacitor (Radial)"
C22 C23 C32: library part Cap, "CAP CER .1UF 16V 10% X7R 0603"
C24 C28: library part Cap, "CAP CER 4.7PF 25V C0G 0201"
C27: library part Cap, "CAP CER 22000PF 16V 10% X7R 0603"
D1 D2: library part "Diode 1N4148", "DIODE SWITCH 100V 400MW SOD123"
D3 D4 D9 D10: library part "D Zener", "Zener Diode"
D5 D6 D7 D8 D11 D12 D13 D14 D16 D19 D20 D21 D22 D23 D24: library part "Diode 1N4148", "High Conductance Fast Diode"
D15: library part Bridge1, "Full Wave Diode Bridge"
D17 D18: library part MBR4060PT, "Schottky Rectifier"
F2: library part "Fuse 1", "Fuse"
J1 J2 J3 J4: library part Socket, "Socket"
JP1: library part "Header 2", "Header, 2-Pin"
L1 L2 L3 L4 L5: library part Inductor, "Inductor"
L6: "Magnetic-Core Inductor"
LS1 LS2: "Loudspeaker"
P1: "Header, 2-Pin"
P2: library part "Header 5", "Header, 5-Pin"
P3 P4 P5: "Header, 4-Pin"
Q1: library part NPN, "NPN Bipolar Transistor"
Q2: library part Triac, "Silicon Bidirectional Triode Thyristor"
Q3 Q4 Q7 Q8: "HEXFET Power MOSFET"
Q5 Q6: library part 2N3904, "NPN General Purpose Amplifier"
Q9 Q10: library part IRF1404, "HEXFET Power MOSFET"
R1 R3 R6 R9 R10 R11 R14 R17 R18 R29: library part Res1, "RES 10K OHM 1/8W .1% 0805 SMD"
R2 R4 R5 R7 R8 R12 R13 R16 R30 R31 R32 R33 R34 R35 R36 R37 R38 R39 R40 R41 R42 R43 R44 R45 R47 R48 R49 R50 R51 R52 R53 R54 R55 R56 R57 R58 R59 R60 R61 R62 R63 R64 R65 R66 R67 R68 R69 R71 R73 R74 R75 R76 R77 R78 R79 R80 R81 R82 R83: library part Res1, "Resistor"
R15: library part "Res Adj1", "Variable Resistor"
R19 R20: library part Res1, "RES 100 OHM 1/10W .1% 0603 SMD"
R21 R22 R23 R24 R25 R26 R27 R28: library part Res1, "RES 10.0K OHM 1/10W 1% 0603 SMD"
R46: library part "Res Varistor", "Varistor (Voltage-Sensitive Resistor)"
R72: library part Res2, "Resistor"
S1: library part HALL, "Shunt Resistor"
T1 T2: "Transformer (Coupled Inductor Model)"
T3: library part "Trans Ideal", "Transformer (Ideal)"
T4: "Center-Tapped Transformer (Ideal)"
U1: library part TL084ACN, "IC OPAMP GP 1MHZ QUAD 14SOIC"
U2: library part INA121UA, "FET-Input, Low Power Instrumentation Amplifier"
U3 U12: library part MC7805CT, "3-Terminal Positive Fixed Voltage Regulator"
U4: library part MCP1541-I/TO, "4.096V Voltage Reference, 3-Pin TO-92, Industrial Temperature"
U5: "IC ADC 16BIT 16CH DELT-SIG 48QFN"
U6: "High-Performance 16-bit Digital Signal Controller with Switch Mode Power Supply, 12 KB Flash, 512 Byte SRAM, 44-Pin TQFP, Industrial Temperature, Tape and Reel"
U7: library part MAX232ACSE, "+5V Powered, Multi-Channel RS-232 Driver/Receiver"
U8 U14 U16: library part TC4427EAPA, "1.5A Dual High-Speed Power MOSFET Driver, Non-Inverting, Industrial Temperature"
U9 U13 U15: library part Optoisolator1, "4-Pin Phototransistor Optocoupler"
U10: library part "Opto TRIAC", "Opto-Triac"
U11: "High and Low Side Driver"
VR1: library part RPot1, "TRIM POT CERM 200KOHM 25TRN TOP"
Y1 Y2: library part XTAL, "Crystal Oscillator"

## Free pads (board coordinates)
  round 196.85 hole 118.11: 0(-1950.24,17524.76) 0(-1950.24,20850.24) 0(8875.24,17524.76) 0(8875.24,20850.24)

## Via types
v1: diameter 38, hole 19.68, Top Layer to Bottom Layer, 89 vias
v2: diameter 62.99, hole 31.5, Top Layer to Bottom Layer, 14 vias
v3: diameter 59.06, hole 28, Top Layer to Bottom Layer, 12 vias
v4: diameter 59.06, hole 31.5, Top Layer to Bottom Layer, 9 vias
v5: diameter 60, hole 31.5, Top Layer to Bottom Layer, 9 vias
v6: diameter 50, hole 23.62, Top Layer to Bottom Layer, 7 vias
v7: diameter 50, hole 28, Top Layer to Bottom Layer, 4 vias
v8: diameter 47.24, hole 23.62, Top Layer to Bottom Layer, 3 vias
v9: diameter 55, hole 31.5, Top Layer to Bottom Layer, 2 vias
v10: diameter 47.24, hole 31.5, Top Layer to Bottom Layer, 1 vias
v11: diameter 47.24, hole 27.56, Top Layer to Bottom Layer, 1 vias
v12: diameter 42, hole 19.68, Top Layer to Bottom Layer, 1 vias
v13: diameter 59.06, hole 23.62, Top Layer to Bottom Layer, 1 vias
v14: diameter 40, hole 19.68, Top Layer to Bottom Layer, 1 vias
v15: diameter 66.93, hole 31.5, Top Layer to Bottom Layer, 1 vias
v16: diameter 59.06, hole 27.56, Top Layer to Bottom Layer, 1 vias

## Nets (pads, with @x,y where several pads share a name; then routed paths per layer and width w, separated by ;. In a path a pad name is that pad's centre, name@x,y a point inside that pad or via, vN(x,y) a via of type N, cw(c..) or ccw(c..) an arc to the next point about the centre after c; other vN are vias at no path point)
+4.096V: C17.1 C19.1 R15.1 U4.2 U5.31 | length 2009.1
  Top Layer w10: U4.2@-550,18150 -550,18235 -530,18255 -440,18255 -405,18290 v1(-405,18335) -405,18369.75 -389.75,18385 -380,18385 -367.35,18397.65 -365.78,18397.65 -365,18398.43 U5.31@-347.32,18398.43
  Top Layer w20: C19.1@-615,18010 -550,18075 U4.2@-550,18150
  Bottom Layer w10: v1(-405,18335) -270,18335 -206.57,18398.43 -41.57,18398.43 -29.5,18410.5 -29.5,18548.29 -18.29,18559.5 105.04,18559.5 117.54,18547 554.5,18547 R15.1@592.5,18585
  Bottom Layer w20: C17.1@-615,17928.92 -550,17993.92 U4.2@-550,18150
+5VA: C5.1 C10.1 C16.1 C33.1 L4.1 U3.3 U4.3 | length 4077.6
  Top Layer w20: C5.1@-485,18010 U4.3@-485,18150
  Top Layer w35: C16.1@1998.92,18420 1998.92,18286.08 2119.92,18165.08 2150,18165.08 2241.54,18165.08 L4.1@2250,18156.61
  Bottom Layer w20: U4.3@-485,18150 C10.1@-485,17928.92 -482.18,17928.92 -435,17881.74 -435,17745 -385,17695 423.89,17695 475.89,17747 548,17747 600,17695 2055,17695 2104.5,17744.5 2104.5,18085.49 2105,18085.99 2105,18160.08 U3.3@2100,18165.08 U3.3@2124.92,18165.08
  other v16: 2105,18200
+12V: C8.1 C12.1 C49.1 C50.1 C57.1 C79.1 C81.1 C83.1 C84.1 D19.2 K1.1 K2.1 L2.1 P4.2 R64.1 U8.6 U14.6 U16.6 | length 20576.1
  Top Layer w22: U8.6@519.49,18775 460,18775 425,18810 425,19000 C50.1@450,19025 545,18930 675,18930 780,18825 1390,18825 1485,18730 1485,18340 1445,18300 1310,18300 1235,18225 v2(1235,18070) ; U14.6@5394.49,17890 C81.1@5550,17890 ; v9(5610,17890) 5610,17675 5675,17610 8040,17610 8105,17675 8105,19085 7875,19315 7875,19640 7975,19740 7975,19875 8040,19940 8240,19940 8465,20165 8465,20210 8545,20290 8625,20290 ; U16.6@8625,20359.49 8625,20290 ; C84.1@8820,20402.5 v1(8820,20335) 8775,20290 8625,20290
  Top Layer w27.56: v2(1660,17780) 1660,17650 1705,17605 2100,17605 2125,17630 2125,17805 2155,17835 2225,17835 2245,17815 2245,17590 2340,17495 4070,17495 4200,17625 P4.2@4200,17925
  Top Layer w30: R64.1@5150,19274.41 5150,19340 5180,19370 5608.7,19370 D19.2@5675,19303.7
  Top Layer w40: 3592.5,18277.5 3605,18290 3640,18325 C57.1@4295,18325
  Top Layer w60: L2.1@3385,18290 3605,18290 ; C12.1@3592.5,18195 3592.5,18277.5 ; K1.1@6045,20130 6045,19673.7 D19.2@5675,19303.7 5675,19090 5760,19005 K2.1@6050,19005
  Top Layer w65: P4.2@4200,17925 4200,18020 4239.5,18059.5 5099.5,18059.5 v15(5195,18155)
  Bottom Layer w22: 5605,18155 5610,18150 v9(5610,17890)
  Bottom Layer w31.5: v2(1235,18070) 1235,17830 1285,17780 v2(1660,17780)
  Bottom Layer w35: L2.1@3385,18290 3391.08,18296.08 C8.1@3592.5,18296.08
  Bottom Layer w60: D19.2@5675,19303.7 5675,19095 5765,19005 K2.1@6050,19005
  Bottom Layer w65: v15(5195,18155) 5605,18155 5950,18155 6050,18255 K2.1@6050,19005
  Bottom Layer w70.87: P4.2@4200,17925 4200,18230 C57.1@4295,18325
  other v13: 385,19025
+20V: C55.1 P3.1 P4.1 | length 8215.7
  Top Layer w25: P3.1@-1905,18725 -2004.5,18625.5 -2004.5,17914.5 -1950,17860 -1815,17860 -1760,17805 -1760,17585 -1630,17455 4195,17455 4350,17610 P4.1@4350,17925
  Top Layer w35: P3.1@-1905,18725 P3.1@-1875,18725
  Bottom Layer w60: P4.1@4350,17925 4525,17925 C55.1@4600,17850
+AVDD: C4.1 C6.1 C7.1 C20.1 C25.1 C80.2 L2.2 S1.3 U1.4 U2.7 U3.1 | length 11963.6
  Top Layer w22: U2.7@1581.46,17975 v1(1515,17975) 1490,18000 1490,18235 1530,18275 1655,18275 1685,18305 1685,18465 1720,18500 1720,18590 1760,18630 1890,18630 1970,18550 C4.1@2100,18550
  Top Layer w25: L2.2@3185,18290 3185,18170 3240,18115 v7(3365,18115) ; v7(3715,18180) 3800,18265 4225,18265 v7(4305,18185) ; v7(4640,17950) 4855,17950 4905,17900 4905,17590 4965,17530 8140,17530 8215,17605 v4(8215,17865) v4(8215,17925)
  Top Layer w35: v5(2100,18425) C4.1@2100,18550 ; v5(2775,18510) 2775,18430 2820,18385 2865,18385 2960,18290 C25.1@3060,18290
  Top Layer w70: C25.1@3060,18290 L2.2@3185,18290
  Bottom Layer w22: v14(235,17893.9) 235,17960 270,17995 590,17995 625,18030 625,18115 650,18140 1275,18140 1315,18100 1315,17996.42 1350,17961.42 C6.1@1475,17961.42
  Bottom Layer w25: v7(3365,18115) 3365,18180 3410,18225 3670,18225 v7(3715,18180) ; v7(4305,18185) 4405,18085 4505,18085 v7(4640,17950)
  Bottom Layer w30: S1.3@7889.57,18900 C80.2@7889.57,18716.34 7993.66,18716.34 8065,18645 8065,18075 v4(8215,17925)
  Bottom Layer w35: C7.1@1998.92,18425 v5(2100,18425) ; U3.1@2100,18345 v5(2100,18425) ; v5(2775,18510) 2690,18510 2675,18495 2320,18495 2285,18460 2135,18460 v5(2100,18425) ; C20.1@2958.92,18290 L2.2@3185,18290
+BOOST: C56.1 C61.1 C64.1 D11.1 P5.2 U11.3 U12.1 | length 4828.6
  Top Layer w22: U11.3@1275,19596.63 1275,19710 1305,19740 D11.1@1375,19740 1505,19740 1520,19755 1615,19755 1635,19735 1635,19370 ; C64.1@1500,19520 1587.5,19432.5 1587.5,19417.5 1635,19370 ; v6(2870,18452.5) 3217.5,18452.5 3280,18390 ; v5(3455,18160) 3415,18200 3325,18200 3280,18245 3280,18390 ; 1635,19370 1700,19305 1945,19305 1975,19275 2300,19275 2365,19210 2450,19210 2503.84,19156.16 C61.1@2503.84,18925 2503.84,18896.16 C56.1@2600,18800 2840,18800 2917.5,18722.5 2917.5,18552.5 2940,18530 3230,18530 3280,18480 3280,18390
  Bottom Layer w31.5: U12.1@2600,18355 2755,18355 2775,18375 2775,18425 2802.5,18452.5 v6(2870,18452.5) v6@2865,18447.5
  Bottom Layer w59.06: v5(3455,18160) 3525,18090 P5.2@3525,17925
+DCBUS: D16.2 F2.1 Q4.2 R53.1 R61.1 | length 1907.1
  Top Layer w45: R61.1@400,19275 495,19370 620,19370 670,19420 670,19580 860,19770 860,20035 1005,20180 1655,20180 F2.1@1675,20200
+VLO: C60.1 C63.1 C66.1 R43.1 U11.11 U12.3 | length 3334
  Top Layer w20: 1090,19150 1090,19075 1135,19030 1135,18970.25 1154.75,18950.5 1334.5,18950.5 1450,18835 1805,18835 1840,18800 1840,18714.23 1880,18674.23 2130.77,18674.23 2185,18620 2185,18300 2215,18270 2270,18270 2295,18295 2295,18345 2320,18370 2498.84,18370 2503.84,18375
  Top Layer w22: R43.1@780,19376.16 1078.84,19376.16 1125,19330 U11.11@1125,19238.37 1125,19185 1090,19150 986.42,19150 C60.1@936.42,19200 ; v5(2540,18175) 2503.84,18211.16 2503.84,18375 C66.1@2503.84,18425 2600,18521.16 C63.1@2600,18550 ; v5@2542.5,18177.5 v5@2545,18175
-12V: C9.2 C13.2 C54.2 L1.1 P4.3 | length 1651.8
  Top Layer w35: C13.2@3455,18635 3580,18635 3675,18540 3920,18540 C54.2@3990,18610
  Top Layer w70: L1.1@3330,18635 C13.2@3455,18635
  Bottom Layer w35: L1.1@3330,18635 C9.2@3543.58,18635
  Bottom Layer w60: C54.2@3990,18610 4050,18550 P4.3@4050,17925
-AVEE: C3.1 C21.2 C26.2 C82.1 L1.2 S1.4 U1.11 U2.4 | length 11722
  Top Layer w20: v1(650,17745) 785,17745 ; v1(1185,18500) 1185,18235 1135,18185 855,18185 785,18115 785,17745 ; C3.1@1448.58,17785 1448.58,17851.42 1425,17875 U2.4@1388.54,17875 1225,17875 1095,17745 785,17745
  Top Layer w22: v1(5770,18275) 5770,18020 5710,17960 5710,17755 5790,17675 7005,17675 7045,17715 7045,17845 7080,17880 7170,17880 7195,17855 7195,17760 7235,17720 7645,17720 7685,17760 7685,17955 7730,18000 S1.4@7889.57,18000
  Top Layer w70: C26.2@3000,18635 L1.2@3130,18635
  Bottom Layer w20: v1(415,17895) 610,17895 650,17855 v1(650,17745) ; v1(1185,18500) 2245,18500 2290,18545 2535,18545 2680,18690 2925,18690 2970,18645 2970,18635
  Bottom Layer w22: L1.2@3130,18635 3130,18755 3190,18815 3890,18815 3950,18875 4075,18875 4120,18830 4120,18765 4160,18725 4225,18725 4290,18660 4600,18660 4645,18705 4645,18850 4680,18885 4880,18885 4935,18830 4935,18345 5005,18275 v1(5770,18275)
  Bottom Layer w32.28: S1.4@7889.57,18000 C82.1@7889.57,18183.66
  Bottom Layer w35: C21.2@2911.42,18635 2970,18635 L1.2@3130,18635
AGND: C3.2 C4.2 C5.2 C6.2 C7.2 C10.2 C11.2 C14.2 C15.2 C16.2 C17.2 C18.2 C19.2 C20.2 C21.1 C22.2 C24.2 C25.2 C26.1 C27.1 C28.2 C29.2 C31.2 C33.2 C80.1 C82.2 D3.1 D4.1 L3.2 R1.1 R12.2 R16.2 U1.5 U1.10 U2.5 U3.2 U4.1 U5.1 U5.5 U5.30 U5.32 U5.33 U5.34 U5.35 U5.36 U5.37 U5.38 U5.39 U5.40 U5.45 U5.46 U5.47 U5.48 U5.49 Y1.3 | length 22694.3
  Top Layer w10: U5.36@-347.32,18300 U5.49@-314.84,18300 ; U5.35@-347.32,18319.69 U5.49@-305,18319.69 ; U5.34@-347.32,18339.37 -275.47,18339.37 U5.39@-275.47,18267.52 ; U5.33@-347.32,18359.06 U5.49@-255.78,18359.06 ; U5.32@-347.32,18378.74 U5.49@-236.1,18378.74 ; U5.30@-347.32,18418.11 -216.41,18418.11 U5.49@-206.57,18408.27 ; U5.37@-314.84,18267.52 -314.84,18295.16 -305,18305 U5.49@-305,18319.69 ; U5.38@-295.15,18267.52 -295.15,18319.69 U5.49@-305,18319.69 ; U5.40@-255.78,18267.52 U5.49@-255.78,18359.06 ; U5.45@-157.36,18267.52 U5.49@-157.36,18359.06 ; U5.46@-137.67,18267.52 U5.49@-137.67,18339.37 ; U5.47@-117.99,18267.52 U5.49@-117.99,18319.69 ; U5.48@-98.3,18267.52 -98.3,18300 U5.1@-65.82,18300 ; U5.5@-65.82,18378.74 -177.04,18378.74 U5.49@-206.57,18408.27 ; U5.49@-255.78,18359.06 U5.49@-236.1,18378.74 ; U5.49@-236.1,18378.74 U5.49@-206.57,18408.27
  Top Layer w15: R1.1@75,17837.01 R1.1@81.89,17843.9
  Top Layer w22: R1.1@81.89,17843.9 U1.5@180.51,17843.9 U1.10@369.49,17843.9 ; Y1.3@275,18450 Y1.3@305,18450 Y1.3@311.42,18450 ; C24.2@311.42,18325 Y1.3@311.42,18450 ; C28.2@311.42,18575 Y1.3@311.42,18450 ; C18.2@606.08,18325 606.08,18368.92 C15.2@525,18450 v2(400,18450) Y1.3@311.42,18450 ; C3.2@1521.42,17785 1521.42,17851.42 1545,17875 U2.5@1581.46,17875 1752.5,17875 D3.1@1795,17832.5 ; C31.2@1775,18070 v10(1840,18070)
  Top Layer w30: v2(-1565,17670) -1515,17620 -605,17620 -550,17675 -550,17775 ; C19.2@-615,17775 -550,17775 ; v5(-550,17856.08) -550,17775 ; C5.2@-485,17775 -550,17775
  Top Layer w35: C27.1@311.42,18250 C24.2@311.42,18325 ; C31.2@1775,18070 v5(1775,18175) 1775,18240 C33.2@1825,18290 1825,18420 ; C4.2@1825,18550 1825,18420 ; C16.2@1926.08,18420 1825,18420 ; C26.1@2725,18635 2725,18560 2695,18530 2695,18410 2785,18320 C25.2@2785,18290 ; L3.2@2825,17925 2825,17865 2880,17810 3015,17810 3050,17775 v3(3050,17635)
  Bottom Layer w15: C22.2@311.42,18165 D4.1@400,18165
  Bottom Layer w22: 500,18450 500,18430 674.96,18255.04 U3.2@1834.25,18255.04 ; D3.1@1787.5,17840 1791.34,17843.84 R12.2@1791.34,17925 1791.34,18021.34 ; v10(1840,18070) 1791.34,18021.34 ; v2(1845,17765) 1845,17840 ; U3.2@1876.08,18213.21 U3.2@1834.25,18255.04 ; 1791.34,18021.34 1791.34,18212.13 U3.2@1834.25,18255.04
  Bottom Layer w25: C21.1@2838.58,18635 2838.58,18616.42 2930,18525 2930,18433.92 2886.08,18390 C20.2@2886.08,18290
  Bottom Layer w30: v2(-1565,17670) -1565,17530 -1500,17465 -1435,17465 ; C10.2@-485,17856.08 v5(-550,17856.08) C17.2@-615,17856.08 -636.08,17856.08 -680,17900 -680,17985 -615,18050 U4.1@-615,18150 -615,18205 -585,18235 -215,18235 v1(-125,18325) -125,18100 -40,18015 90,18015 ; R12.2@1787.5,17921.16 R12.2@1791.34,17925
  Bottom Layer w35: -1435,17465 3050,17465 ; v5(75,17875) 75,18000 90,18015 120,18045 350,18045 400,18095 D4.1@400,18165 v2(400,18450) 500,18450 R16.2@601.16,18450 ; D3.1@1787.5,17840 1845,17840 C11.2@1876.08,17840 ; U3.2@1834.25,18255.04 1825,18264.29 1825,18425 C7.2@1926.08,18425 ; L3.2@2825,17925 2886.08,17986.08 C20.2@2886.08,18290 ; v3(3050,17635) 3050,17465 ; C80.1@7889.57,18633.66 C82.2@7889.57,18266.34 7908.66,18266.34 7965,18210 7965,18095 8115,17945 8115,17610 7970,17465 3050,17465
  other v1: 1505,17865
  other v2: -1565,17615 2850,18290
DIS1: R75.1 U6.10 U16.2 | length 15041.8
  Top Layer w8: v1(-1395,17775) -1335,17835 -1335,17970 -1359,17994 -1721.63,17994 -1757,18029.37 -1757,18173 -1650,18280 -1417.63,18280 -1371,18326.63 -1371,18676.63 -1313.74,18733.89 -1133.03,18733.89 -1110.98,18711.85 U6.10@-1110.98,18687.44 ; v1(5295,17710) 5295,17625 5340,17580 8095,17580 8145,17630 8145,19095 7905.31,19334.69 7905.31,19632.94 8005,19732.63 8005,19837.63 8078.37,19911 8258.37,19911 8377.37,20030 8538.66,20030 R75.1@8575,20066.34
  Top Layer w15: R75.1@8575,20066.34 U16.2@8575,20170.51
  Bottom Layer w8: v1(-1395,17775) -1395,17655 -1342,17602 2385,17602 2431.31,17648.31 2933.82,17648.31 3011.51,17726 3078.49,17726 3133.49,17671 3582.75,17671 3651.75,17602 5262,17602 5295,17635 v1(5295,17710)
DIS2: R76.1 U6.11 U16.4 | length 14925.8
  Top Layer w8: v1(-1345,17775) -1315,17805 -1315,17980 -1345,18010 -1715,18010 -1741,18036 -1741,18164 -1641,18264 -1411,18264 -1355,18320 -1355,18670 -1337.56,18687.44 U6.11@-1142.48,18687.44 ; v1(5255,17675) 5255,17595 5286,17564 8104,17564 8161,17621 8161,19101.63 7921.31,19341.31 7921.31,19626.31 8021,19726 8021,19831 8085,19895 8265,19895 8384,20014 8622.66,20014 R76.1@8675,20066.34
  Top Layer w15: R76.1@8675,20066.34 U16.4@8675,20170.51
  Bottom Layer w8: v1(-1345,17775) -1345,17655 -1308,17618 2378,17618 2425,17665 2927.88,17665 3004.88,17742 3085.12,17742 3140.12,17687 3589.37,17687 3658.37,17618 5233,17618 5255,17640 v1(5255,17675)
DIS3: R66.2 U6.27 U14.4 | length 7756.1
  Top Layer w8: v1(-1295,17775) -1295,18115 -1270,18140 -1090,18140 -1016.5,18213.5 U6.27@-1016.5,18242.56
  Top Layer w10: U14.4@5205.51,17840 5240,17840 v1(5240,17720)
  Top Layer w20: R66.2@5091.34,17840 U14.4@5205.51,17840
  Bottom Layer w8: v1(-1295,17775) -1295,17660 -1269,17634 2369,17634 2418.5,17683.5 2923.75,17683.5 2998.25,17758 3091.75,17758 3146.75,17703 3596,17703 3665,17634 5154,17634 v1(5240,17720)
ENPWM: R33.1 R36.2 U6.38 | length 2406.8
  Top Layer w10: U6.38@-762.56,18433.5 -688.5,18433.5 -665,18410 v1(-665,18370)
  Bottom Layer w10: v1(-665,18370) -509.75,18370 -480,18399.75 -480,18445 -505,18470 -505,18555 -475,18585 105,18585 125,18565 385,18565 415,18595 415,18675 340,18750 340,18800 360,18820 500,18820 535,18855 535,19171.34 555,19191.34 R36.2@600,19191.34
  Bottom Layer w20: R36.2@600,19191.34 R33.1@700,19191.34
ERROR: R77.1 U6.42 U15.4 | length 13307.8
  Top Layer w8: U6.42@-762.56,18559.49 -809.49,18559.49 -825,18575 -825,18625 -795,18655 -525,18655 -500,18680 -500,18720 -480,18740 60,18740 85,18715 v1(85,18670) ; v1(205,18670) 300,18670 320,18690 515,18690 530,18675 v1(530,18640) ; v1(1755,18435) 1755,18305 1695,18245 1695,18165 1650,18120 1650,18010 1690,17970 1895,17970 1925,18000 2092.63,18000 2176.63,17916 2281.63,17916 2315,17882.63 2315,17770 2330,17755 2330,17645 2445,17530 3875,17530 3975,17630 3975,18055 3920,18110 3435,18110 3375,18170 3300,18170 3245,18225 3245,18355 3205,18395 v1(3025,18395) ; v1(4200,18675) 4235,18640 4565,18640 4630,18705 4630,18880 4690,18940 v1(4900,18940) ; v1(5345,18940) 5595,18940 5650,18885 v1(5650,18040)
  Top Layer w25: R77.1@6341.34,18040 6341.34,17963.66 6365,17940 U15.4@6450,17940
  Bottom Layer w8: v1(85,18670) v1(205,18670) ; v1(530,18640) 715,18640 760,18595 760,18475 800,18435 v1(1755,18435) ; v1(3025,18395) 3155,18395 3200,18440 3200,18740 3245,18785 3315,18785 3340,18760 3340,18720 3270,18650 3270,18605 3300,18575 3860,18575 3961.03,18676.03 4198.97,18676.03 v1(4200,18675) ; v1(4900,18940) v1(5345,18940) ; v1(5650,18040) 5710,18100 6045,18100 6070,18075 6070,18040 6110,18000 6390,18000 U15.4@6450,17940
FAN: R65.2 U6.28 U14.2 | length 7852.1
  Top Layer w8: v1(-1245,17755) -1245,17794.26 -1275.74,17825 -1275.74,18109.26 -1265,18120 -1080,18120 -985,18215 U6.28@-985,18242.56
  Top Layer w10: U14.2@5205.51,17940 5240,17940 5270,17910 5270,17780 v1(5290,17760)
  Top Layer w20: R65.2@5091.34,17940 U14.2@5205.51,17940
  Bottom Layer w8: v1(-1245,17755) -1245,17675 -1220,17650 2360,17650 2409.5,17699.5 2917.13,17699.5 2991.63,17774 3098.37,17774 3153.37,17719 3606,17719 3675,17650 5120,17650 5230,17760 v1(5290,17760)
GMID: C69.1 C76.2 C77.1 T4.4